# Altium PCB UKU205.PcbDoc (part 2 of 3)
Units mm, origin at the board's own origin, x right, y up, seen from the top; angles counter-clockwise.
Board outline 374.65 x 264.35 mm, 2 copper layers (Top Layer, Bottom Layer); 276 components, 443 nets, 1000 pads, 796 vias.
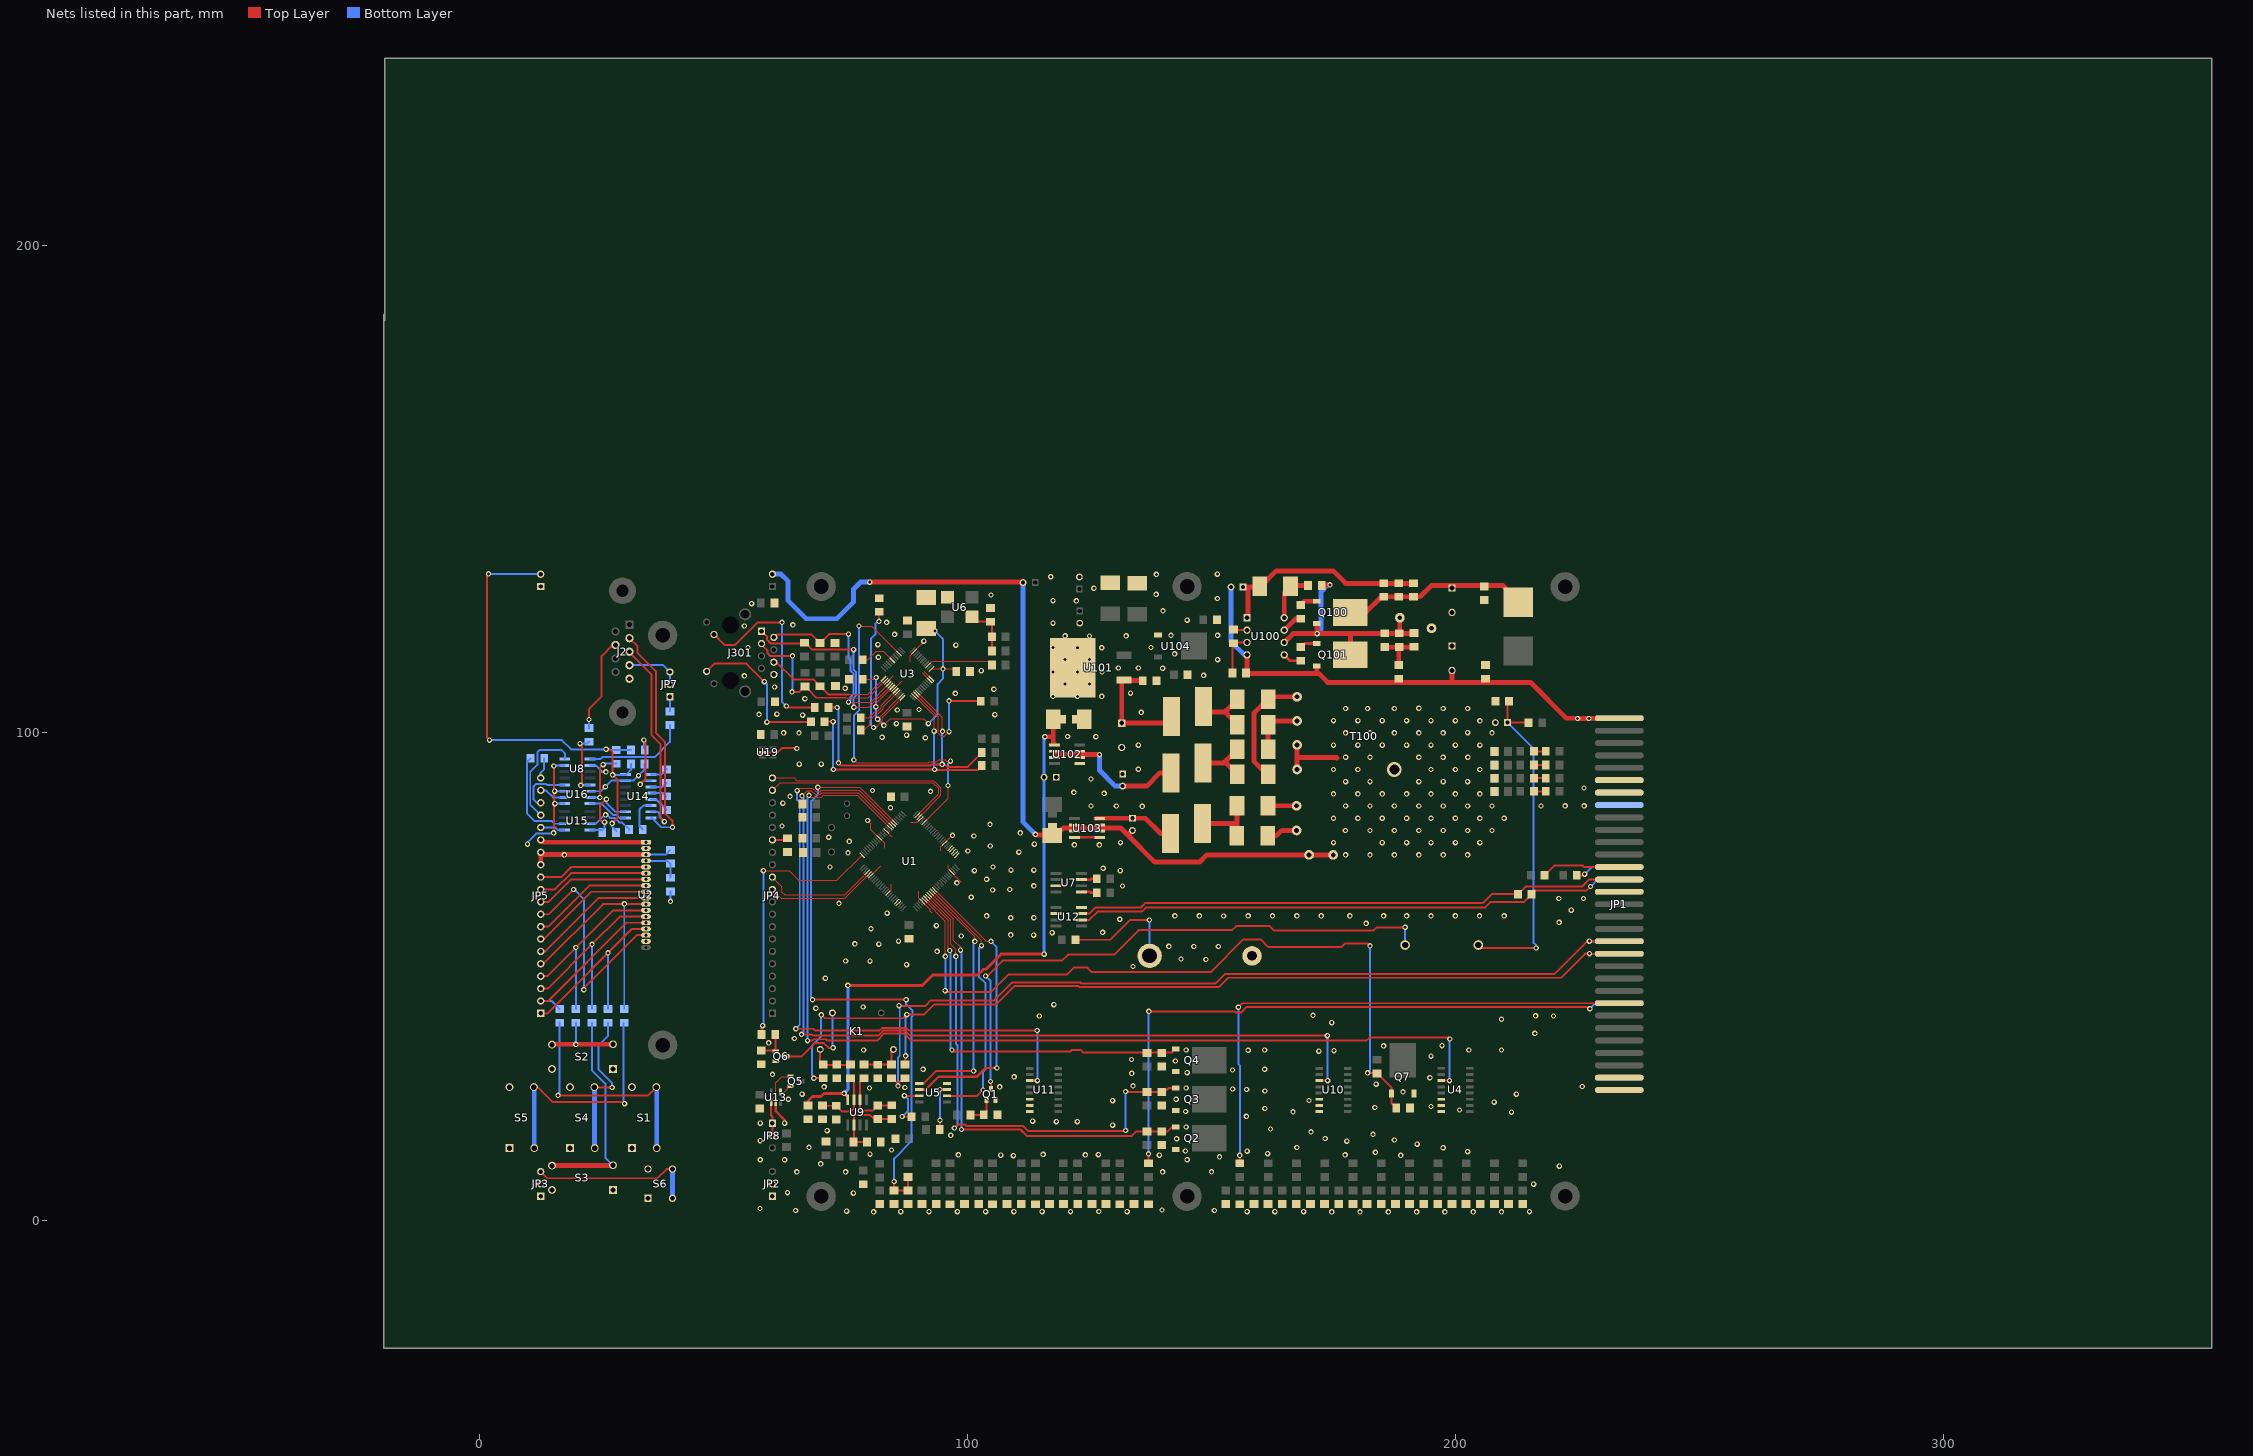
[diagram p2: the nets of this part, all layers, seen from the top]

## Via types
v1: diameter 1.1, hole 0.6, Top Layer to Bottom Layer, 795 vias
v2: diameter 3, hole 2, Top Layer to Bottom Layer, 1 vias

## Nets (pads, with @x,y where several pads share a name; then routed paths per layer and width w, separated by ;. In a path a pad name is that pad's centre, name@x,y a point inside that pad or via, vN(x,y) a via of type N, cw(c..) or ccw(c..) an arc to the next point about the centre after c; other vN are vias at no path point) (continued)
+IAKB: JP1.39 JP1.40 R62.1 R63.2 | length 201.7
  Top Layer w0.4: v1@68.8,29.25 68.838,29.212 R63.2@70.393,29.212 ; v1(70,42.2) 70.7,41.5 86.8,41.5 v1(87.55,42.25) 91.05,42.25 93.15,44.35 105.85,44.35 109.65,48.15 122.7,48.15 122.95,47.9 151.5,47.9 153.4,49.8 221.65,49.8 226.6,54.75 v1(227.5,54.75) 227.525,54.725 JP1.39@233.589,54.725 ; R62.1@87.15,32 87.178,32.028 87.3,32.15 v1@87.3,33.55
  Bottom Layer w0.4: v1@68.8,29.25 68.1,29.95 68.1,35.9 70,37.8 v1(70,42.2) ; v1@87.3,33.55 87.3,42 v1(87.55,42.25) ; v1(227.5,54.75) 227.525,54.725 JP1.40@233.589,54.725
  other v1: 68.5,29.2 87.3,33.8
+UOUT: 
-5V: C13.1 C16.2 C57.2 C105.2 U9.4 U102.1 | length 127.3
  Top Layer w0.6: C16.2@67.298,23.595 67.298,24.548 68.2,25.45 69.9,25.45 70.55,26.1 v1(74.7,26.1) 75.442,25.358 U9.4@75.442,24.811 ; v1(75.45,48.25) 90.75,48.25 92.85,50.35 102.05,50.35 103.25,51.55 103.8,51.55 106.9,54.65 v1(115.7,54.65)
  Top Layer w1: v1(115.85,99.2) 117.561,99.2 ; C105.2@117.561,102.794 117.561,97.939 U102.1@117.7,97.8
  Bottom Layer w0.6: v1(74.7,26.1) 75.45,26.85 v1(75.45,48.25) ; v1(115.7,54.65) 115.7,99.05 v1(115.85,99.2)
-5V_IZ: 
-5VIZ: C14.1 C59.2 C107.2 C108.2 JP6.2 T100.8 T100.9 U103.2 U103.3 U103.6 U103.7 | length 181.6
  Top Layer w1: v1(79.95,130.9) 111.35,130.9 C59.2@111.4,130.85 ; v1(113.9,79.2) 114.05,79.05 C108.2@117.4,79.05 ; C108.2@117.2,79.1 118.25,79.1 119.65,80.5 131.4,80.5 132.835,79.065 ; C107.2@133.792,79.989 132.868,79.065 132.835,79.065 ; T100.8@174.95,75 169.95,75 149.05,75 147.55,73.5 138.4,73.5 132.835,79.065
  Bottom Layer w1: JP6.2@60,132.54 61.76,132.54 63.2,131.1 63.2,127.1 66.9,123.4 73.2,123.4 76.65,126.85 76.65,129.5 78.05,130.9 v1(79.95,130.9) ; C59.2@111.4,130.85 111.4,81.7 v1(113.9,79.2)
-48V: C100.2 C106.2 C114.2 C117.2 JP1.1 JP1.2 Q101.3 R109.2 U100.4 | length 114.3
  Top Layer w1: C114.2@157.2,112.2 171.95,112.2 173.8,110.35 215.4,110.35 222.75,103 JP1.1@233.589,103 ; U100.4@157.284,115.983 157.284,112.266 157.325,112.225 157.35,112.2 C114.2@157.35,112.25 ; Q101.3@171.569,113.715 171.569,112.381 171.6,112.35 ; C106.2@199.293,112.801 199.293,110.443 199.3,110.435 199.3,110.4 ; v1(225.05,102.95) v1(227.35,102.95)
  Bottom Layer w1: C100.2@153.95,129.9 153.989,129.861 153.989,118.711 156.717,115.983 U100.4@157.284,115.983 ; v1(225.05,102.95) 225.1,103 JP1.2@233.589,103
-IAKB: JP1.37 JP1.38 R61.2 R62.2 | length 179.6
  Top Layer w0.4: R61.2@84.393,29.212 84.588,29.212 v1@85.75,28.05 ; v1@85.719,28.081 86.938,29.3 R62.2@87.2,29.3 ; v1(85.95,44.1) 86,44.05 91.4,44.05 92.5,45.15 105.5,45.15 109.2,48.85 123.05,48.85 123.25,48.65 150.85,48.65 152.8,50.6 220.35,50.6 227.05,57.3 v1(227.45,57.3) 227.5,57.25 JP1.37@233.6,57.25
  Bottom Layer w0.4: v1@85.75,28.05 85.75,33.45 86.1,33.8 86.1,43.95 v1(85.95,44.1) ; v1(227.45,57.3) 227.475,57.275 JP1.38@233.589,57.275
  other v1: 85.75,27.65
-UOUT: 
CANH: JP1.27 R129.2 U12.7 | length 113.1
  Top Layer w0.4: U12.7@123.339,62.932 124.932,62.932 126.25,64.25 135.55,64.25 136.4,65.1 205.6,65.1 207.45,66.95 R129.2@212.7,66.95 ; R129.2@212.812,66.907 214.406,68.5 225.95,68.5 227.4,69.95 JP1.27@233.589,69.95
CANL: JP1.28 R129.1 U12.6 | length 113.7
  Top Layer w0.4: U12.6@123.339,61.662 124.962,61.662 126.65,63.35 135.75,63.35 136.65,64.25 206.1,64.25 207.15,65.3 214.006,65.3 216.356,67.65 226.85,67.65 v1(227.7,68.5)
  Bottom Layer w0.4: v1(227.7,68.5) 229.15,69.95 JP1.28@233.589,69.95
DB4: 
GND: BT1.2 C1.2 C2.2 C3.2 C4.2 C5.2 C6.2 C7.2 C8.2 C9.2 C10.2 C11.1 C12.2 C13.2 C15.1 C16.1 C17.1 C18.2 C19.2 C20.2 C21.1 C22.1 C23.2 C24.1 C25.1 C31.1 C33.1 C34.2 C35.2 C36.1 C37.1 C38.1 C39.1 C40.1 C41.1 C42.2 C43.2 C44.2 C45.2 C46.2 C47.2 C48.2 C49.2 C50.2 C51.2 C52.2 C53.2 C54.2 C55.2 C56.2 C57.1 C58.2 C101.2 C102.2 C104.1 C105.1 C109.1 C110.2 C301.1 C302.1 C303.1 C304.1 D1.1 D3.1 D4.1 D5.1 D7.1 D8.1 J301.8 JP1.11 JP1.12 JP1.13 JP1.14 JP1.59 JP1.60 JP1.61 JP1.62 JP2.1 JP2.2 Q1.2 Q2.3 Q3.3 Q4.3 Q6.2 Q7.3 R10.2 R12.2 R13.2 R14.2 R15.2 R16.2 R23.1 R24.1 R26.1 R27.1 R28.1 R29.1 R36.1 R49.1 R57.1 R58.1 R60.1 R74.2 R75.2 R76.2 R77.2 R78.2 R111.1 R112.1 R113.1 R114.1 R117.1 R118.1 R122.2 R126.2 R127.2 R128.2 T100.4 T100.5 U1.11 U1.15 U1.31 U1.41 U1.55 U1.72 U1.83 U1.97 U3.15 U3.19 U3.35 U3.36 U3.47 U4.6 U4.7 U4.8 U5.4 U6.2 U7.3 U10.6 U10.7 U10.8 U11.6 U11.7 U11.8 U12.2 U12.8 U13.2 U19.2 U101.4 U102.5 U104.1 | length 69.9
  Top Layer w0.25: v1(79.5,82.05) 80.2,81.35 80.2,80.186 83,77.386 83,76.3 ; U1.31@80.145,70.695 82.15,72.7 82.2,72.7 ; U1.11@83.327,79.887 84.5,78.714 84.5,78.7 ; U3.15@83.498,110.397 84.801,111.7 ; U1.41@83.681,67.159 84.4,67.878 84.4,69 ; U3.19@84.912,108.983 86.629,110.7 ; 88.25,114.6 88.25,115.856 v1@91.05,118.656 ; 88.4,81.65 89.686,81.65 U1.97@90.398,82.362 ; 90,67.5 90,66.143 92.35,63.793 92.35,63.404 92.642,63.112 ; 90.7,112.3 90.7,112.281 U3.35@92.23,110.75 ; 91.038,112.65 U3.36@92.584,111.104 ; 94.55,75.8 94.55,76.614 96.9,78.964 v1(96.9,79) ; 96,72.95 96,72.164 98.65,69.514 98.65,69.5
  Top Layer w0.4: U19.2@57.934,95.992 61.101,95.992 62.009,96.9 64.9,96.9 v1(65,96.8)
  Top Layer w0.5: U13.2@60.7,24.225 60.7,22.45 62.5,20.65 v1(62.5,20)
  Top Layer w1: T100.4@167.55,92.5 T100.5@167.55,97.55 ; 167.55,94.95 175.599,94.95 175.699,94.85
  other v1: 80.75,1.8 174.65,1.8 180.45,1.8 186.25,1.8 192.05,1.8 197.85,1.8 203.65,1.8 209.45,1.8 86.3,1.85 92.1,1.85 97.9,1.85 103.7,1.85 109.5,1.85 115.3,1.85 121.1,1.85 132.7,1.85 157.299,1.85 162.999,1.85 168.899,1.85 215.199,1.85 126.9,1.9 75.2,1.95 64.75,2.1 150.6,2.1 139.85,2.2 57.45,2.5 76.6,5.65 63.1,5.75 216.05,7.5 65,10 75,10 140,10 150,10 221.3,11.2 69.9,11.65 57.5,12.5 62.5,12.5 145,12.5 151.65,13.1 109.4,13.35 188.799,13.4 106.8,13.45 139.3,13.45 98.1,13.5 124.15,13.5 177.399,13.5 126.8,13.55 115.5,13.6 80,13.65 161.499,13.75 183.6,14 202.499,14.15 157.299,14.25 144.65,14.3 84.4,14.5 197.499,14.95 167.499,15 67.5,15.05 192.15,15.7 177.75,16.3 57.5,16.4 187.499,16.55 142.85,16.8 173.299,16.85 96.55,17.5 183.1,17.7 170.399,18.2 71.2,18.45 162.1,18.8 144.8,19.2 129.75,19.6 57.5,20 118.2,20.3 122.5,20.3 113.35,20.4 157.15,21.4 211.499,22.25 166.7,22.3 144.7,22.4 200.85,22.7 160.95,23 183.499,23.2 195,23.4 207.95,24.3 129.75,24.6 169.999,24.65 63.25,24.9 142.75,24.9 66.1,25.95 212.499,25.95 189.25,26.4 160.95,26.6 157.199,26.9 154.35,27 79.9,27.2 144.8,27.2 87.15,27.3 70.6,27.45 106.6,27.45 226,27.5 133.9,27.65 183.75,28 194.75,29.3 109.55,29.5 60,30 133.65,30.2 145,30.35 154.3,30.9 90.9,31.05 160.899,31.05 142.6,32.75 133.6,33.05 194.999,33.75 171.999,34.75 175.099,34.85 157.499,34.95 78.7,35 144.8,35 160.9,35 202.75,35 209.45,35 185.299,35.85 197.25,35.9 59.25,36.45 64.5,37.35 216.3,38.4 174.65,40.6 209.45,41.3 114.7,41.95 220.099,41.95 216.45,42 170.8,42.1 68.9,43.55 78.6,43.8 117.7,44.3 70.85,49.7 133.9,52.1 87.5,52.5 80,53.2 75,53.25 148.85,53.55 143.75,53.65 93.75,55.2 146.4,56.2 151.4,56.2 141.25,56.25 81.8,56.7 76.9,56.75 85.85,57.3 98.7,58.35 113.55,58.55 108.85,58.6 117.35,59.05 127.7,59.1 80.2,59.85 93.6,60.5 181.7,60.95 221.25,61.15 131.2,61.8 108.85,62.1 113.6,62.1 152.5,62.45 103.9,62.5 142.5,62.5 147.5,62.5 157.5,62.5 162.5,62.5 167.5,62.5 172.5,62.5 178.35,62.5 185.3,62.5 190,62.5 195,62.5 200,62.5 204.95,62.5 210,62.5 83.5,63.05 223.75,63.65 73.65,65.05 221.2,66.05 226.25,66.05 100.75,66.3 105.15,67.8 108.65,67.9 131.75,68.6 113.6,68.65 97.8,69.25 103.9,70 101.4,71.75 131.3,71.75 108.9,71.85 113.6,71.85 127.8,72.25 71.8,72.5 105.2,72.5 177.499,75 182.499,75 187.499,75 192.499,75 197.5,75 202.499,75 75.5,75.4 110.5,75.55 100.05,75.8 104.65,76.8 121.9,77.05 127,77.05 113.7,77.2 131.35,77.5 174.999,77.5 185,77.5 189.999,77.5 195,77.5 199.999,77.5 204.999,77.5 75.75,77.75 71.55,78.6 101.3,78.85 110.8,79.5 177.45,80 182.5,80 187.5,80 192.5,80 197.5,80 202.5,80 207.499,80 61.95,80.9 104.6,81.25 175,82.5 179.999,82.5 184.999,82.5 190,82.5 195,82.5 199.999,82.5 205,82.5 209.999,82.5 84.2,84.65 135.8,84.95 125.3,85 130.5,85 177.499,85 182.499,85 187.5,85 192.499,85 197.5,85 202.499,85 207.5,85 217.55,85 222.499,85.05 226.399,85.05 62.15,85.6 63.6,87 174.999,87.5 180,87.5 185,87.5 189.999,87.5 194.999,87.5 199.999,87.5 204.999,87.5 128,87.6 121.8,87.8 92.4,88 80.5,88.2 226.35,88.7 177.499,90 182.499,90 192.5,90 197.5,90 202.5,90 125.3,90.55 174.999,92.5 180,92.5 194.999,92.5 200,92.5 204.999,92.5 135,92.55 65.5,93.6 70,93.6 177.5,95 182.499,95 192.499,95 197.499,95 202.55,95 135,97.5 174.999,97.5 180,97.5 184.999,97.5 189.999,97.5 195,97.5 199.999,97.5 205,97.5 91.35,99 82.5,99.1 126.3,99.2 120.5,99.25 87.5,99.55 62.3,100 65.45,100 177.499,100 182.5,100 187.5,100 192.499,100 197.499,100 207.5,100 202.499,100.05 85.4,101.9 204.999,102.45 174.999,102.5 179.999,102.5 185,102.5 190,102.5 194.999,102.5 199.999,102.5 66.2,103.65 105.6,103.75 57.25,103.8 60.9,103.85 135.6,104.2 85.6,104.7 90.05,104.8 187.5,105 202.5,105 177.499,105 181.999,105 197.499,105 192.499,105.05 66.65,107 117.5,107.5 122.5,107.5 127.5,107.5 97.5,108.1 133.4,108.15 105.4,108.95 74.9,109.15 60.45,109.4 120,110 125,110 54.25,111.7 148.4,111.8 122.5,112.45 117.55,112.5 127.55,112.5 102.8,112.75 140,113.25 130.9,113.3 135,113.3 120,115 125,115 151.25,115 81.7,115.5 142.45,116.2 122.5,117.45 127.5,117.45 55,117.5 117.5,117.5 137.6,117.5 97.6,118 81.6,118.1 91.05,118.8 125,119.85 120,119.9 132.5,119.9 141.7,120 151.25,120 85.05,120.2 54.25,121.9 64.2,122.15 117.5,122.5 83.4,122.65 145,123.1 140.05,125 55.75,126.5 122.3,127.05 117.5,127.1 151.2,127.55 104.8,128.25 138.65,128.4 125.9,129.65 117.05,132 138.7,132.5 151.2,132.55
  other v2: 187.5,92.5
I1: JP1.47 R6.2 | length 110.5
  Top Layer w0.4: v1(155.5,43.75) 156.325,44.575 JP1.47@233.575,44.575 ; v1(155.8,13.4) 155.807,13.393 R6.2@155.807,11.788
  Bottom Layer w0.4: v1(155.5,43.75) 155.5,32.15 155.807,31.843 v1@155.807,13.393
I2: JP1.48 R7.2 | length 128.7
  Top Layer w0.4: v1@137.1,13.2 137.107,13.193 R7.2@137.107,11.788 ; v1(137.15,42.9) 154.7,42.9 154.95,42.65 156.05,42.65 157.25,43.85 227.15,43.85 v1(227.55,43.45)
  Bottom Layer w0.4: v1@137.1,13.2 v1@137.1,42.85 ; v1(227.55,43.45) 228.675,44.575 JP1.48@233.589,44.575
  other v1: 137.1,13.7
NetA1_1: A1.1 Q1.3 | length 118.2
  Top Layer w0.4: v1(103.7,50.15) 104.05,50.15 107.2,53.3 119.35,53.3 120.6,54.55 130.05,54.55 135.05,59.55 154.2,59.55 155.05,60.4 161.9,60.4 162.85,59.45 183.15,59.45 183.85,60.15 v1(189.7,60.15) ; v1(104.7,28.55) 104.8,28.55 104.802,28.548 Q1.3@104.802,26.998
  Bottom Layer w0.4: v1(103.7,50.15) 104.7,49.15 v1(104.7,28.55) ; A1.1@189.697,56.512 189.697,60.147 v1(189.7,60.15)
NetA1_2: A1.2 C19.1 R56.1 R57.2 | length 69.5
  Top Layer w0.4: A1.2@204.7,56.45 205.25,55.9 v1(216.55,55.9) ; R57.2@211,106.45 210.657,106.107 210.657,102.093 R56.1@214.988,102.093
  Bottom Layer w0.4: C19.1@210.689,102.108 216.05,96.747 216.05,56.95 216.55,56.45 v1(216.55,55.9)
NetBT1_1: BT1.1 D6.1 | length 24.2
  Top Layer w0.4: D6.1@122.095,57.591 129.241,57.591 133.3,61.65 v1(137.25,61.65)
  Bottom Layer w0.4: v1(137.25,61.65) 137.305,61.595 BT1.1@137.305,54.291
NetC9_1: C9.1 C10.1 C20.1 U3.18 U3.23 U3.37 | length 63.9
  Top Layer w0.25: C10.1@78.505,110.998 80.798,110.998 v1@81.15,111.35 ; v1(81.2,105.35) 81.2,105.978 U3.18@84.558,109.336 ; v1(81.55,102.8) 81.558,102.8 U3.23@86.326,107.568 ; v1(82.85,101.55) 84.15,102.85 91,102.85 v1(91.95,101.9) ; U3.37@92.584,113.119 97.178,113.119 C9.1@97.695,112.602
  Top Layer w0.4: C20.1@91.3,121.35 92.811,121.389 v1(93.3,120.9)
  Bottom Layer w0.4: v1@81.15,111.35 81.2,111.3 81.2,103.2 81.575,102.825 v1(82.85,101.55) ; v1(91.95,101.9) 92,101.95 92,102 93.85,103.85 93.85,110 94.95,111.1 94.95,119.25 v1(93.3,120.9)
  other v1: 81.25,111.35 94.95,113.119
NetC18_1: C18.1 R50.1 R51.1 U6.4 | length 10.3
  Top Layer w0.4: U6.4@100.9,123.8 101.912,122.788 C18.1@104.707,122.788 104.988,122.507 R50.1@104.988,119.693 R51.1@104.988,116.793
NetC22_2: C22.2 K1.3 R61.1 R64.1 | length 8.9
  Top Layer w0.4: R64.1@78.75,31.9 78.862,32.012 R61.1@84.393,32.012 84.393,34.643 K1.3@84.8,35.05
NetC23_1: C23.1 K1.1 R63.1 R65.1 | length 9
  Top Layer w0.4: K1.1@69.794,35.11 69.794,32.506 70.4,31.9 R65.1@75.95,31.9
NetC24_2: C24.2 C32.2 R59.1 R66.1 U9.6 | length 16.2
  Top Layer w0.4: U9.6@76.712,19.611 76.712,21.212 77.15,21.65 80.05,21.65 80.85,20.85 84.431,20.85 C32.2@84.443,20.862 ; U9.6@76.75,19.7 76.75,16.25 76.65,16.15 76.7,16.1 C24.2@79.35,16.1
NetC26_1: C26.1 U14.3 | length 3.5
  Bottom Layer w0.4: U14.3@35.089,88.913 37.463,88.913 C26.1@38.25,89.7
NetC26_2: C26.2 U14.1 | length 3.7
  Bottom Layer w0.4: U14.1@35.089,91.453 37.203,91.453 C26.2@38.3,92.55
NetC27_1: C27.1 U14.2 | length 14.2
  Top Layer w0.4: v1(32.9,89.45) 33.95,90.5 33.95,98.25 v1(33.65,98.55)
  Bottom Layer w0.4: v1(32.9,89.45) 33.633,90.183 U14.2@35.089,90.183 ; v1(33.65,98.55) 33.65,96.85 C27.1@33.9,96.6
NetC27_2: C27.2 C28.1 JP9.2 R47.1 R48.2 U14.16 | length 99.5
  Top Layer w0.4: v1@1.5,132.6 1.5,99 v1(2,98.5) ; v1(25.9,96.65) 26.6,96.65 27.25,96 v1(27.25,91.4) 28.25,90.4 28.25,82.55 v1(27.15,81.45)
  Bottom Layer w0.4: v1@1.5,132.6 12.423,132.6 JP9.2@12.488,132.535 ; v1(2,98.5) 16.85,98.5 18.75,96.6 26.65,96.6 ; 26.669,96.581 26.757,96.493 C27.2@31.012,96.493 ; v1(27.15,81.45) 27.15,80.756 R47.1@28.012,79.893 ; v1(27.25,91.4) 30,91.4 30.995,92.395 C28.1@30.995,93.598
  other v1: 1.8,132.6
NetC28_2: C28.2 C30.2 J2.5 JP9.1 U8.2 U14.15 U15.7 U16.2 | length 28
  Bottom Layer w0.4: U15.7@22.589,81.368 23.768,81.368 25.5,83.1 26.25,83.1 26.8,82.55 27.65,82.55 27.769,82.431 ; U16.2@22.611,88.032 24.832,88.032 v1(25.761,88.961) 27,90.2 31.5,90.2 33.8,92.5 C28.2@33.8,93.598 ; U8.2@22.611,93.332 23.768,93.332 25.1,92 v1(25.85,92) ; 27.7,82.5 27.769,82.431 ; C30.2@30.605,80.202 29.157,81.65 28.55,81.65 27.769,82.431
  other v1: 25.8,83.2 32.535,91.235
NetC29_1: C29.1 U14.4 | length 3.4
  Bottom Layer w0.4: U14.4@35.089,87.643 37.507,87.643 C29.1@38.2,86.95
NetC29_2: C29.2 U14.5 | length 4.1
  Bottom Layer w0.4: U14.5@35.089,86.373 36.129,86.373 C29.2@38.298,84.205
NetC30_1: C30.1 U14.6 | length 7
  Bottom Layer w0.4: C30.1@33.405,80.202 32.75,80.857 32.75,84.3 33.553,85.103 U14.6@35.089,85.103
NetC32_1: C32.1 R59.2 R64.2 U9.2 | length 13.7
  Top Layer w0.4: R64.2@78.793,29.212 77.982,28.401 U9.2@77.982,24.811 77.982,22.918 78.35,22.55 80.519,22.55 81.631,23.662 C32.1@84.443,23.662
NetC35_1: C35.1 R60.2 R65.2 U9.3 | length 13.7
  Top Layer w0.4: R60.2@70.257,23.588 70.282,23.562 C35.1@73.093,23.562 74.256,22.4 76.15,22.4 76.712,22.962 U9.3@76.712,24.811 76.712,28.493 R65.2@75.993,29.212
NetC100_1: C100.1 D100.1 R100.2 R101.2 R102.2 U100.1 | length 43.9
  Top Layer w1: C100.1@156.489,129.908 160.008,129.908 163.3,133.2 174.95,133.2 177.5,130.65 185.45,130.65 R102.2@191.5,130.65 ; U100.1@157.3,123.55 157.5,123.75 157.5,129.9
NetC101_1: C101.1 C109.2 L100.2 U101.1 | length 23.6
  Top Layer w0.7: L100.2@141.768,103.393 L100.2@141.793,103.393
  Top Layer w1: C109.2@135.905,110.698 135.852,110.75 132,110.75 131.593,110.343 C101.1@131.593,102.001 140.401,102.001 141.78,103.38 L100.2@141.793,103.393
NetC103_1: C103.1 FU100.2 Q100.4 R100.1 R101.1 R102.1 R103.1 | length 38.2
  Top Layer w1: Q100.4@178.419,124.7 181.65,124.7 184.85,127.9 191.65,127.9 192.749,127.9 195.049,130.2 199.9,130.2 209.75,130.2 212.7,127.25 FU100.2@212.7,126.85
NetC103_2: C103.2 C106.1 R103.2 R109.1 T100.1
NetC104_2: C104.2 L101.2 U102.2 U102.3 U102.6 U102.7 | length 29.6
  Top Layer w1: 117.8,95.6 127,95.6 v1(127.05,95.55) ; C104.2@131.75,89.1 136.689,89.089 139.393,91.793 L101.2@141.668,91.793
  Bottom Layer w1: v1(127.05,95.55) 127.05,92.3 130.25,89.1 C104.2@131.75,89.1
NetC107_1: C107.1 L102.2 U103.8 | length 16.5
  Top Layer w1: U103.8@126.35,82.45 126.389,82.489 136.461,82.489 139.557,79.393 L102.2@141.568,79.393
NetC111_1: C111.1 D100.2 U100.8 | length 10.6
  Top Layer w1: U100.8@164.903,123.603 U100.8@164.904,123.603 164.904,128.704 166.402,130.202 C111.1@169.795,130.202
NetC111_2: C111.2 Q100.3 Q101.4 R106.1 R107.1 R108.1 T100.2 U100.6 | length 49.1
  Top Layer w1: U100.6@164.904,118.523 166.731,120.35 191.381,120.35 R106.1@191.494,120.463 ; v1@171.65,120.45 Q100.3@171.65,122.35 ; C111.2@172.55,130.3 173.8,130.3 v1@173.85,130.35 ; Q101.4@178.4,116.05 178.5,116.15 178.5,120.35 ; R107.1@188.6,120.35 T100.2@188.6,123.6
  Bottom Layer w1: v1(171.65,120.35) 172.45,121.15 172.45,128.95 v1@173.85,130.35
  other v1: 174.3,130.35
NetC114_1: C114.1 R105.1 U100.3 | length 9
  Top Layer w0.4: C114.1@154.288,112.293 154.288,118.169 R105.1@154.507,118.388 154.642,118.523 U100.3@157.284,118.523
NetC117_1: C117.1 R106.2 R107.2 R108.2 | length 10
  Top Layer w1: R108.2@185.3,117.55 191.6,117.55 R106.2@191.65,117.5 ; C117.1@188.393,113.912 188.393,117.493 R107.2@188.45,117.55
NetD101_1: D101.1 D102.2 T100.3 | length 24
  Top Layer w1: D102.2@161.45,91.4 158.7,94.15 158.7,104.05 162.05,107.4 T100.3@167.55,107.4
NetD101_2: D101.2 D103.2 L100.1 | length 12.3
  Top Layer w1: L100.1@148.372,105.425 149.497,104.3 153.05,104.3 ; D103.2@155.309,101.706 155.344,101.706 153,104.05 153,104.559 D101.2@155.309,106.869
NetD102_1: D102.1 D104.1 L101.1 | length 11.9
  Top Layer w1: L101.1@148.272,93.825 152.965,93.825 ; D102.1@155.309,91.481 152.9,93.891 152.9,94.235 D104.1@155.309,96.644
NetD103_1: D103.1 D104.2 T100.6 | length 11.4
  Top Layer w1: D104.2@161.65,96.55 161.607,96.593 161.6,96.6 161.6,101.7 162.35,102.45 T100.6@167.55,102.45
NetD105_1: D105.1 T100.7 | length 5.9
  Top Layer w1: D105.1@161.6,85.05 T100.7@167.45,85.05
NetD105_2: D105.2 D106.2 L102.1 | length 13.2
  Top Layer w1: L102.1@148.172,81.425 155.125,81.425 155.191,81.359 ; D106.2@155.191,78.906 155.191,85.041 D105.2@155.2,85.05
NetD106_1: D106.1 T100.10 | length 6.4
  Top Layer w1: D106.1@161.55,78.915 D106.1@161.541,78.906 163.306,78.906 164.4,80 T100.10@167.45,80
NetJ2_2: J2.2 U14.8 | length 47.6
  Top Layer w0.4: J2.2@30.684,119.411 32.35,117.745 32.35,116.35 36.1,112.6 36.1,100 37.95,98.15 37.95,83.55 39.5,82 v1(39.5,80.65)
  Bottom Layer w0.4: U14.8@35.089,82.563 35.287,82.563 37.2,80.65 v1(39.5,80.65)
NetJ2_3: J2.3 U14.7 | length 41.8
  Top Layer w0.4: J2.3@30.684,116.641 30.684,116.516 35.2,112 35.2,99.6 37.05,97.75 37.05,82.6 v1(37.85,81.8)
  Bottom Layer w0.4: U14.7@35.089,83.833 36.467,83.833 36.85,83.45 36.85,82.8 v1(37.85,81.8)
NetJ2_4: J2.4 JP7.2 JP7.3 | length 11.4
  Bottom Layer w0.4: J2.4@30.684,113.871 37.589,113.871 39,112.46 JP7.2@39,110
NetJ2_7: J2.7 R52.2 | length 19.8
  Top Layer w0.4: v1@22.4,102.35 22.4,104.9 25,107.5 25,115.75 27.276,118.026 J2.7@27.844,118.026
  Bottom Layer w0.4: v1@22.4,102.35 22.4,100.9 R52.2@22.45,100.85
  other v1: 22.4,102.75
NetJ301_1: J301.1 R301.1 U3.17 | length 42.4
  Top Layer w0.25: v1(76.7,105.25) 79.765,105.25 U3.17@84.205,109.69
  Top Layer w0.4: J301.1@57.75,120.845 58.9,119.695 58.9,119.05 59.6,118.35 66.5,118.35 66.9,118.35 68.2,117.05 v1(76.65,117.05)
  Bottom Layer w0.4: v1(76.65,117.05) 76.65,112.905 77.15,112.405 77.15,107.694 76.65,107.194 76.65,105.3 v1(76.7,105.25)
NetJ301_2: J301.2 R302.2 U3.16 | length 41.7
  Top Layer w0.25: v1(75.6,106.3) 80.108,106.3 U3.16@83.851,110.043
  Top Layer w0.4: J301.2@60.3,119.575 60.925,120.2 67.95,120.2 69.75,118.4 71.6,120.25 v1(75.6,120.25)
  Bottom Layer w0.4: v1(75.6,106.3) 76,106.7 76,107.322 76.6,107.922 76.6,112.178 76,112.778 76,114.85 75.6,115.25 v1(75.6,120.25)
NetJ301_3: J301.3 R303.1 U3.14 | length 37.3
  Top Layer w0.25: 74.95,107.2 79.594,107.2 U3.14@83.144,110.75
  Top Layer w0.4: J301.3@57.75,118.305 57.75,118.1 59,116.85 59,116.3 59.5,115.8 v1(64.1,115.8) ; v1(64,108.4) 65.519,108.4 R303.1@66.657,109.538 R303.1@67.397,108.797 ; R303.1@67.4,108.8 69,107.2 74.95,107.2
  Bottom Layer w0.4: v1(64,108.4) 64.1,108.5 v1(64.1,115.8)
NetJ301_6: J301.6 R304.2 U3.13 | length 26.5
  Top Layer w0.25: 75.6,107.9 79.587,107.9 U3.13@82.79,111.104
  Top Layer w0.4: J301.6@60.3,114.495 60.805,114.495 64.35,110.95 68.356,110.95 71.406,107.9 75.6,107.9
NetJ301_10: J301.10 R305.1 | length 40.2
  Top Layer w0.4: J301.10@48.02,120.17 50.14,118.05 52.35,118.05 56.95,122.65 v1(61.95,122.65) ; v1(62.85,105.5) 63.157,105.193 R305.1@68.688,105.193
  Bottom Layer w0.4: v1(61.95,122.65) 61.95,106.4 v1(62.85,105.5)
NetJ301_11: J301.11 R306.1 | length 31.8
  Top Layer w0.4: J301.11@46.5,112.6 48.1,114.2 54.65,114.2 v1(58.35,110.5) ; v1(58.85,102.2) R306.1@68.1,102.2
  Bottom Layer w0.4: v1(58.35,110.5) 58.85,110 v1(58.85,102.2)
NetJP1_16: JP1.16
NetJP1_29: JP1.29
NetJP3_1: JP3.1 JP3.2 R90.2 S1.1 S2.1 S3.1 S4.1 S5.1 S6.1 U2.2 U8.7 U16.5 U16.7 | length 28.3
  Top Layer w0.4: v1(15.15,79.5) 15.2,79.55 v1(15.2,93.2)
  Bottom Layer w0.4: v1(9.8,77.2) 9.8,77.6 11.55,79.35 15,79.35 v1(15.15,79.5) ; v1(15.2,93.2) 15.332,93.332 U8.7@17.411,93.332 ; v1(15.35,88.05) 15.368,88.032 U16.7@17.411,88.032 ; v1(15.408,85.492) U16.5@17.411,85.492 ; v1@39.1,65.85 39.107,65.857 R90.2@39.107,67.512
  other v1: 39.1,65.45
NetJP3_3: JP3.3 S6.2 | length 34.4
  Top Layer w0.4: JP3.3@12.489,10.071 13.86,8.7 36.4,8.7 38.291,10.591 S6.2@39.501,10.591
  Bottom Layer w1: S6.2@39.5,4.55 39.501,4.551 S6.2@39.501,10.591
NetJP4_15: JP4.15 R29.2 | length 3.3
  Top Layer w0.4: JP4.15@60,78.06 62.783,78.06 R29.2@63.114,78.391
NetJP5_1: JP5.1 R4.2 U2.15 | length 40.3
  Top Layer w0.4: JP5.1@12.5,42.5 13.9,42.5 31.21,59.81 U2.15@34.075,59.81
  Bottom Layer w0.4: v1(26.3,54.9) 26.317,54.883 R4.2@26.317,43.388
NetJP5_2: JP5.2 R1.2 U2.14 | length 32.8
  Top Layer w0.4: JP5.2@12.5,45.04 14.04,45.04 30.08,61.08 U2.14@34.075,61.08
  Bottom Layer w0.4: JP5.2@12.5,45.04 14.741,45.04 R1.2@16.393,43.388
NetJP5_3: JP5.3 R3.2 U2.13 | length 41
  Top Layer w0.4: JP5.3@12.5,47.58 13.93,47.58 v1(23,56.65) 28.7,62.35 U2.13@34.075,62.35
  Bottom Layer w0.4: v1(23,56.65) 23.009,56.641 R3.2@23.009,43.388
NetJP5_4: JP5.4 R2.2 U2.12 | length 39.8
  Top Layer w0.4: JP5.4@12.5,50.12 13.82,50.12 27.32,63.62 U2.12@34.075,63.62
  Bottom Layer w0.4: v1(19.7,56) 19.701,55.999 R2.2@19.701,43.388
NetJP5_5: JP5.5 R5.2 U2.11 | length 48.2
  Top Layer w0.4: JP5.5@12.5,52.66 13.06,52.66 25.29,64.89 U2.11@34.075,64.89
  Bottom Layer w0.4: R5.2@29.625,43.388 29.625,64.925 v1(29.65,64.95)
NetJP5_6: JP5.6 U2.10 | length 26.1
  Top Layer w0.4: JP5.6@12.5,55.2 13.45,55.2 24.41,66.16 U2.10@34.075,66.16
NetJP5_7: JP5.7 U2.9 | length 25.6
  Top Layer w0.4: JP5.7@12.5,57.74 13.14,57.74 22.83,67.43 U2.9@34.075,67.43
NetJP5_8: JP5.8 U2.8 | length 25.1
  Top Layer w0.4: JP5.8@12.5,60.28 14.03,60.28 22.45,68.7 U2.8@34.075,68.7
NetJP5_9: JP5.9 U2.16 | length 47.9
  Top Layer w0.4: JP5.9@12.5,62.82 14.17,62.82 v1(19.25,67.9) ; v1(21.35,47.35) 21.35,47.7 32.19,58.54 U2.16@34.075,58.54
  Bottom Layer w0.4: v1(19.25,67.9) 19.35,67.9 21.35,65.9 v1(21.35,47.35)
NetJP5_10: JP5.10 U2.7 | length 23.5
  Top Layer w0.4: JP5.10@12.5,65.36 14.11,65.36 18.72,69.97 U2.7@34.075,69.97
NetJP5_11: JP5.11 U2.6 | length 23
  Top Layer w0.4: JP5.11@12.5,67.9 15.4,67.9 18.74,71.24 U2.6@34.075,71.24
NetJP5_12: JP5.12 U2.5 | length 22.4
  Top Layer w0.4: JP5.12@12.5,70.44 16.74,70.44 18.81,72.51 U2.5@34.075,72.51
NetJP5_13: JP5.13 JP5.14 R89.1 U2.3 | length 29.9
  Top Layer w1: JP5.13@12.45,73 12.5,73.05 12.5,75.5 12.5,75.05 U2.3@34.075,75.05
  Bottom Layer w0.4: U2.3@34.075,75.05 38.1,75.05 R89.1@39.05,76
  other v1: 17.35,75
NetJP5_15: JP5.15 U2.1 | length 21.8
  Top Layer w1: JP5.15@12.5,78.15 13.06,77.59 U2.1@34.075,77.59
NetJP5_16: JP5.16 U15.1 | length 5.2
  Bottom Layer w0.4: JP5.16@12.55,80.65 JP5.16@12.5,80.6 15.5,80.6 16.002,80.098 U15.1@17.389,80.098
NetJP5_17: JP5.17 U8.8 | length 21.6
  Bottom Layer w0.4: JP5.17@12.5,83.14 10.35,85.29 10.35,92 11.8,93.45 11.8,96 12.25,96.45 16.8,96.45 17.45,95.8 17.45,94.7 U8.8@17.4,94.65
NetJP5_18: JP5.18 U16.8 | length 11.1
  Bottom Layer w0.4: JP5.18@12.5,85.7 JP5.18@12.5,85.68 11.67,85.68 11,86.35 11,89 11.5,89.5 13.6,89.5 13.798,89.302 U16.8@17.411,89.302
NetJP5_19: JP5.19 U16.6 | length 5.5
  Bottom Layer w0.4: JP5.19@12.5,88.22 13.58,88.22 15.038,86.762 U16.6@17.411,86.762
NetJP5_20: JP5.20 R43.1 | length 4.3
  Bottom Layer w0.4: JP5.20@12.5,90.76 12.5,91.8 13.212,92.512 R43.1@13.212,94.793
NetJP7_1: JP7.1 R53.2 | length 3
  Bottom Layer w0.4: JP7.1@38.989,107.391 38.989,104.461 R53.2@39.05,104.4
NetJP8_1: JP8.1 JP8.2 Q5.1 U13.1 | length 14.9
  Top Layer w0.25: U13.1@59.75,24.225 59.75,24.8 60.65,25.7 60.65,28.3 61.894,29.544 Q5.1@63.695,29.544
  Top Layer w0.4: U13.1@59.75,24.225 59.75,21.6 60,21.35 JP8.2@60,17.46
NetK1_5: K1.5 Q6.3 | length 18.3
  Top Layer w0.4: Q6.3@62.898,33.698 65.998,33.698 68.7,36.4 70.55,36.4 71.5,35.45 v1(72.45,35.45)
  Bottom Layer w0.4: K1.5@72.294,42.61 72.294,35.606 v1(72.45,35.45)
NetQ1_1: Q1.1 R34.2 R36.2 | length 6
  Top Layer w0.4: R34.2@100.588,21.693 103.299,21.693 R36.2@103.312,21.707 103.852,22.246 Q1.1@103.852,24.798
NetQ5_2: Q5.2 U13.4 | length 2.6
  Top Layer w0.25: U13.4@61.65,26.375 62.426,26.375 Q5.2@63.695,27.644
NetQ6_1: Q6.1 R35.2 R58.2 | length 6.7
  Top Layer w0.4: R58.2@57.707,34.888 60.459,34.888 Q6.1@60.698,34.648 60.588,34.759 R35.2@60.588,38.193
NetQ100_1: Q100.1 R104.2 | length 3.7
  Top Layer w1: R104.2@168.2,126.2 168.985,126.985 Q100.1@171.569,126.985
NetQ101_1: Q101.1 R110.2 | length 3.6
  Top Layer w0.6: R110.2@168.307,117.588 169.069,118.35 Q101.1@171.55,118.35
NetR1_1: R1.1 S1.2 | length 48.5
  Top Layer w0.4: v1(16.05,25.7) 34.512,25.7 S1.2@36.203,27.391
  Bottom Layer w0.4: v1(16.05,25.7) 16.35,26 16.35,40.544 R1.1@16.393,40.588
  Bottom Layer w1: S1.2@36.2,27.5 36.256,27.444 36.283,27.417 S1.2@36.283,14.891
NetR2_1: R2.1 S2.2 | length 16.9
  Top Layer w1: S2.2@14.889,36.183 S2.2@27.309,36.183
  Bottom Layer w0.4: v1(19.7,36.15) v1(19.7,36.15) R2.1@19.701,40.588
NetR3_1: R3.1 S3.2 | length 43.5
  Top Layer w1: S3.2@14.809,11.303 S3.2@27.303,11.303
  Bottom Layer w0.4: R3.1@23.009,40.588 23.009,30.841 25.75,28.1 25.75,12.942 S3.2@27.309,11.383
NetR4_1: R4.1 S4.2 | length 31.5
  Top Layer w0.4: S4.2@23.503,27.391 23.594,27.3 v1(27.15,27.3)
  Bottom Layer w0.4: R4.1@26.317,40.588 26.317,37.917 24.35,35.95 24.35,30.95 27.15,28.15 v1(27.15,27.3)
  Bottom Layer w1: S4.2@23.503,27.391 23.503,14.971 S4.2@23.583,14.891
NetR5_1: R5.1 S5.2 | length 49.1
  Top Layer w0.4: S5.2@11.103,27.391 11.859,27.391 14.9,24.35 29.35,24.35 v1(29.7,24)
  Bottom Layer w0.4: R5.1@29.5,40.55 29.5,24.2 v1(29.7,24)
  Bottom Layer w1: S5.2@11.1,27.35 11.183,27.267 S5.2@11.183,14.891
NetR33_1: R33.1 U3.39 | length 13.8
  Top Layer w0.25: U3.39@91.877,113.826 92.75,114.7 104.181,114.7 R33.1@104.988,113.893
NetR37_1: R37.1 R306.2 U3.26 | length 58.7
  Top Layer w0.25: U3.26@89.048,107.568 93.15,103.467 v1(93.15,100.35)
  Top Layer w0.4: R306.2@71.488,102.293 72.407,102.293 72.45,102.25 v1(72.45,102.3) ; v1(72.5,92.5) 93.05,92.5 v1@93.15,92.4 ; v1@93.136,92.414 102.109,92.414 R37.1@102.988,93.293
  Bottom Layer w0.4: v1(72.45,102.3) 72.45,92.55 v1(72.5,92.5) ; v1@93.15,92.4 v1(93.15,100.35) v1@93.2,100.4
  other v1: 93.25,92.5
NetR38_1: R38.1 R305.2 U3.28 | length 61.3
  Top Layer w0.25: U3.28@89.755,108.275 94.85,103.181 v1(94.85,100.3)
  Top Layer w0.4: R305.2@71.488,105.193 73.243,105.193 v1(73.25,105.2) ; v1(73.55,93.85) 74.1,93.3 92.3,93.3 92.55,93.55 95.35,93.55 95.85,93.05 100.05,93.05 R38.1@103,96
  Bottom Layer w0.4: v1(73.25,105.2) 73.55,104.9 v1(73.55,93.85) ; v1(94.8,93.55) 94.8,100.25 v1(94.85,100.3)
NetR39_1: R39.1 U3.27 | length 25.9
  Top Layer w0.25: U3.27@89.402,107.922 94,103.324 94,99.9 94.6,99.3 95.25,99.3 v1(96.2,100.25)
  Top Layer w0.4: v1(96.2,106.55) 102.931,106.55 R39.1@102.988,106.493
  Bottom Layer w0.4: v1(96.2,100.25) v1(96.2,106.55)
NetR40_2: R40.2 U7.7 | length 3.2
  Top Layer w0.5: U7.7@123.339,69.932 125.182,69.932 125.357,70.107 R40.2@126.462,70.107
NetR41_2: R41.2 U7.5 | length 3.2
  Top Layer w0.5: U7.5@123.339,67.392 125.108,67.392 125.293,67.207 R41.2@126.462,67.207
NetR42_1: R42.1 U3.21 | length 11.4
  Top Layer w0.25: R42.1@78.112,100.607 78.807,100.607 79.9,101.7 79.9,102.557 81.293,103.95 81.666,103.95 82.7,104.984 82.7,105.357 U3.21@85.619,108.275
NetR43_2: R43.2 U15.2 | length 20.2
  Bottom Layer w0.4: R43.2@10.412,94.793 9.65,94.031 9.65,83.55 11.3,81.9 14.8,81.9 15.332,81.368 U15.2@17.389,81.368
NetR44_1: R44.1 U3.20 | length 9.7
  Top Layer w0.25: R44.1@78.112,103.107 79.743,103.107 80.553,103.917 80.986,104.35 81.5,104.35 82.3,105.15 82.3,105.664 U3.20@85.265,108.629
NetR45_1: R45.1 U3.7 | length 7.5
  Top Layer w0.25: R45.1@78.512,115.007 79.557,115.007 81.25,116.7 82.745,116.7 U3.7@84.558,114.887
NetR47_2: R47.2 U14.10 U15.8 | length 15.8
  Top Layer w0.4: v1(25.6,81.7) 25.15,81.7 24.65,82.2 24.65,85.1 25.428,85.878 v1(25.95,86.4)
  Bottom Layer w0.4: U15.8@22.589,80.098 25.002,80.098 R47.2@25.05,80.05 ; R47.2@25.2,80.05 R47.2@25.05,80.05 ; v1(25.6,81.7) 25.6,80.6 25.2,80.2 25.053,80.053 R47.2@25.05,80.05 ; v1(25.95,86.4) 25.95,85.7 27.817,83.833 U14.10@29.889,83.833
NetR48_1: R48.1 U16.3 | length 11.8
  Top Layer w0.4: v1(24.612,86.762) 24.612,92.812 v1(25.3,93.5)
  Bottom Layer w0.4: U16.3@22.611,86.762 v1(24.612,86.762) ; v1(25.3,93.5) 25.488,93.688 R48.1@27.993,93.688
NetR49_2: R49.2 U3.24 | length 33.1
  Top Layer w0.25: v1(80.75,101.1) 81.15,101.1 82.55,102.5 82.55,103.085 85.225,105.761 U3.24@86.68,107.215 ; R49.2@81.893,124.412 81.893,123.207 v1@81.9,123.2
  Bottom Layer w0.4: v1(80.75,101.1) 80.2,101.65 80.2,119.3 81.1,120.2 81.1,122.35 81.9,123.15 v1@81.9,123.2
  other v1: 81.85,122.85
NetR52_1: R52.1 U16.1 | length 12.4
  Top Layer w0.4: v1(20.55,97.8) 21,97.35 v1@21,89.25
  Bottom Layer w0.4: v1(20.55,97.8) 22.006,97.8 R52.1@22.393,98.188 ; v1@21,89.25 21.052,89.302 U16.1@22.611,89.302
  other v1: 20.7,89.25
NetR53_1: R53.1 U8.1 | length 21.3
  Bottom Layer w0.4: U8.1@22.6,94.65 24.8,94.65 25.2,95.05 35.9,95.05 38.993,98.143 R53.1@38.993,101.588
NetR72_1: R72.1 U5.3 | length 9.7
  Top Layer w0.4: R72.1@94.309,18.714 94.35,18.756 v1@94.35,20.2 ; v1(94.35,26.9) 94.37,26.88 U5.3@95.796,26.88
  Bottom Layer w0.4: v1@94.35,20.2 v1(94.35,26.9)
  other v1: 94.35,20.6
NetR73_2: R73.2 U5.7 | length 10.1
  Top Layer w0.4: v1(86.6,21.35) 86.636,21.314 R73.2@88.509,21.314 ; v1(87.05,25.65) 87.09,25.61 U5.7@90.096,25.61
  Bottom Layer w0.4: v1(86.6,21.35) 87.8,22.55 87.8,24.85 87.05,25.6 v1(87.05,25.65)
NetR89_2: R89.2 R90.1 U2.4 | length 8.1
  Bottom Layer w0.4: U2.4@34.075,73.78 38.37,73.78 39.107,73.043 R90.1@39.107,70.312
NetR92_2: R92.2 R93.1 | length 2.4
  Top Layer w0.4: R93.1@216.109,96.214 R92.2@218.509,96.214
NetR94_2: R94.2 R95.1 | length 2.4
  Top Layer w0.4: R95.1@216.109,93.414 R94.2@218.509,93.414
NetR96_2: R96.2 R97.1 | length 2.5
  Top Layer w0.4: R97.1@216.05,90.7 216.064,90.714 R96.2@218.509,90.714
NetR98_2: R98.2 R99.1 | length 2.4
  Top Layer w0.4: R99.1@216.109,88.014 R98.2@218.509,88.014
NetR104_1: R104.1 U100.7 | length 4.3
  Top Layer w1: U100.7@164.904,121.063 167.241,123.4 R104.1@168.2,123.4
NetR105_2: R105.2 U100.2 | length 2.8
  Top Layer w0.4: R105.2@154.507,121.188 154.631,121.063 U100.2@157.284,121.063
NetR110_1: R110.1 U100.5 | length 3.9
  Top Layer w0.6: U100.5@164.904,115.983 166.1,114.788 R110.1@168.307,114.788
NetU2_17: U2.17
NetU13_3: 
NetU14_9: U14.9 U16.4 | length 8.7
  Bottom Layer w0.4: U16.4@22.611,85.492 24.958,85.492 25,85.45 ; 24.8,85.45 25.05,85.45 27.3,83.2 28,83.2 28.637,82.563 U14.9@29.889,82.563
NetU103_4: U103.4 U103.5 | length 5.2
  Top Layer w0.5: U103.4@121.9,78.595 U103.5@127.1,78.595
OFF1: JP1.25 R54.2 | length 16.3
  Top Layer w0.4: R54.2@218.288,70.793 220.294,72.8 226.15,72.8 226.45,72.5 JP1.25@233.589,72.5
OFF2: JP1.26 R55.2 | length 9.4
  Top Layer w0.4: R55.2@224.888,70.793 226.243,70.793 v1(226.5,71.05)
  Bottom Layer w0.4: v1(226.5,71.05) 227.95,72.5 JP1.26@233.589,72.5
P0_0: U1.46
P0_1: U1.47
P0_2: JP4.20 U1.98 | length 43.2
  Top Layer w0.25: JP4.20@60,90.76 64.44,90.76 65,90.2 93.066,90.2 94.5,88.766 94.5,87.171 U1.98@90.045,82.716
P0_3: JP4.19 U1.99 | length 42.6
  Top Layer w0.25: JP4.19@60,88.22 61.58,89.8 92.9,89.8 94.1,88.6 94.1,87.478 U1.99@89.691,83.069
P0_5: U1.80
P0_6: U1.79
P0_7: U1.78
P0_8: U1.77
P0_9: U1.76
P0_15: U1.62 U5.6 | length 60.1
  Top Layer w0.25: U1.62@93.226,67.866 103.843,57.25 v1(104.8,57.25)
  Top Layer w0.5: U5.6@90.096,26.88 91.43,26.88 94.1,29.55 101.9,29.55 103.65,31.3 v1(106,31.3)
  Bottom Layer w0.4: v1(104.8,57.25) 105.75,56.3 105.9,56.15 v1@105.9,31.35
P0_17: U1.61 U5.2 | length 53.7
  Top Layer w0.25: U1.61@92.873,67.513 102.85,57.536 v1(102.85,56.4)
  Top Layer w0.4: U5.2@95.796,25.61 101.96,25.61 v1(103.15,26.8)
  Bottom Layer w0.4: v1(102.85,56.4) 102.3,55.85 102.3,50.05 103.7,48.65 103.7,31 103.15,30.45 v1(103.15,26.8)
P0_18: U1.60 U5.5 | length 52.5
  Top Layer w0.25: U1.60@92.519,67.159 101.5,58.179 v1(101.5,57.25)
  Top Layer w0.4: U5.5@90.096,28.15 91.05,28.15 93.6,30.7 v1(101.25,30.7)
  Bottom Layer w0.4: v1(101.25,30.7) 101.25,57 v1(101.5,57.25)
P0_19: Q2.1 R121.1 R122.1 U1.59 | length 96
  Top Layer w0.25: U1.59@92.166,66.806 97.1,61.872 97.1,57.5 98.55,56.05 v1(98.55,55.45)
  Top Layer w0.4: v1(98.75,18.7) 110.85,18.7 112.15,17.4 133.7,17.4 134.6,18.3 139.85,18.3 141,18.3 141.888,19.188 Q2.1@142.671,19.188
  Bottom Layer w0.4: v1(98.55,55.45) 98.75,55.25 v1(98.75,18.7)
P0_20: Q3.1 R123.1 R126.1 U1.58 | length 105
  Top Layer w0.25: U1.58@91.812,66.452 96.55,61.714 96.55,56.7 97.6,55.65 v1(97.6,54.2)
  Top Layer w0.4: v1(97.3,19) 98.05,19.75 99.4,19.75 99.7,19.45 111.35,19.45 112.45,18.35 132.25,18.35 v1@132.45,18.55 ; v1(132.4,26.5) 132.5,26.4 140.4,26.4 141.188,27.188 Q3.1@142.671,27.188
  Bottom Layer w0.4: v1(97.3,19) 97.9,19.6 97.9,36 97.6,36.3 v1(97.6,54.2) ; v1(132.4,18.5) v1(132.4,26.5)
P0_21: Q4.1 R124.1 R127.1 U1.57 | length 79.9
  Top Layer w0.25: U1.57@91.459,66.099 96,61.557 96,55.75 v1(96.35,55.4)
  Top Layer w0.4: v1(96.8,35) 97.1,34.7 121.1,34.7 121.4,35 123.2,35 123.75,34.45 141.85,34.45 Q4.1@142.6,35.2
  Bottom Layer w0.4: v1(96.35,55.4) 96.5,55.25 96.5,35.3 v1(96.8,35)
P0_22: Q7.1 R125.1 R128.1 U1.56 | length 151
  Top Layer w0.25: U1.56@91.105,65.745 95.45,61.4 v1(95.45,54.2)
  Top Layer w0.4: v1(95.4,47.15) 95.7,46.85 104.75,46.85 108.35,50.45 120.35,50.45 121.8,51.9 124.55,51.9 125.5,50.95 149.85,50.95 156.55,57.65 160.05,57.65 161.55,56.15 176.7,56.15 177.4,56.85 182,56.85 v1(182.5,56.35) ; v1(182,30.3) 183.85,30.3 186.912,27.238 Q7.1@186.912,26.071 186.912,24.065 R128.1@187.891,23.086
  Bottom Layer w0.4: v1(95.4,47.15) 95.45,47.2 v1(95.45,54.2) ; v1(182,30.3) 182.5,30.8 v1(182.5,56.35)
P0_23: U1.9 U4.3 | length 213.8
  Top Layer w0.25: v1(67.5,87.2) 67.85,86.85 70.1,86.85 70.45,87.2 77.428,87.2 U1.9@84.034,80.594
  Top Layer w0.4: v1(67.2,36.9) 68.15,36.9 68.45,37.2 70.9,37.2 71.2,36.9 81.45,36.9 82.95,38.4 87,38.4 88.5,36.9 181.75,36.9 182.4,37.55 198.55,37.55 v1(198.85,37.25) ; U4.3@197.07,28.712 198.788,28.712 v1(198.8,28.7)
  Bottom Layer w0.4: v1(67.2,36.9) 67.2,86.9 v1(67.5,87.2) ; v1(198.8,28.7) 198.8,37.2 v1(198.85,37.25)
P0_24: U1.8 U10.3 | length 191
  Top Layer w0.25: v1(66.05,87.1) 67.1,88.15 68,88.15 68.75,87.4 69.8,87.4 70.1,87.7 ; 70.066,87.7 77.636,87.7 U1.8@84.388,80.948
  Top Layer w0.4: v1(65.95,38.2) 68.05,38.2 68.3,37.95 81.722,37.95 82.722,38.95 87.228,38.95 88.228,37.95 v1(173.75,37.95) ; U10.3@172.075,28.705 173.795,28.705 v1(173.8,28.7)
  Bottom Layer w0.4: v1(65.95,38.2) 66.35,38.6 66.35,86.8 v1(66.05,87.1) ; v1(173.75,37.95) 173.75,28.75 v1(173.8,28.7)
P0_25: U1.7 U11.3 | length 134.4
  Top Layer w0.25: v1(65.05,88.15) 65.6,88.7 68.2,88.7 68.95,87.95 69.75,87.95 70.05,88.25 77.793,88.25 U1.7@84.741,81.301
  Top Layer w0.4: v1(64.8,39.35) 68.35,39.35 68.7,39 81.994,39 82.494,39.5 87.456,39.5 87.956,39 v1(114.25,39) ; U11.3@112.775,28.705 114.295,28.705 v1(114.3,28.7)
  Bottom Layer w0.4: v1(64.8,39.35) 65.6,40.15 65.6,85.7 65.05,86.25 v1(65.05,88.15) ; v1(114.25,39) 114.3,38.95 v1(114.3,28.7)
P0_26: C42.1 D7.2 R71.1 U1.6 | length 129.2
  Top Layer w0.25: v1(69.3,88.85) 77.9,88.85 U1.6@85.095,81.655
  Top Layer w0.4: v1(68.2,45.3) v1(87.4,45.3) ; v1@84.95,7.7 84.95,6.269 C42.1@84.893,6.212 84.901,6.22 87.807,6.22 R71.1@87.807,8.988
  Bottom Layer w0.4: v1(68.2,45.3) 67.95,45.55 67.95,86 69.3,87.35 v1(69.3,88.85) ; v1@84.95,7.7 84.95,12.75 88.55,16.35 88.5,16.4 88.5,41.75 88.75,42 88.75,43 87.4,44.35 v1(87.4,45.3)
  other v1: 84.95,8.05
P0_27: R35.1 U1.25 | length 56.9
  Top Layer w0.25: v1(58.15,71.75) 58.2,71.7 63.45,71.7 65.4,69.75 73.19,69.75 U1.25@78.377,74.937
  Top Layer w0.4: R35.1@57.788,38.193 57.788,39.538 v1@57.85,39.6
  Bottom Layer w0.4: v1@57.85,39.6 58.15,39.9 v1(58.15,71.75)
  other v1: 58,40
P0_29: JP4.12 U1.29 | length 23.5
  Top Layer w0.25: JP4.12@60,70.44 61.95,68.49 61.95,67.35 62.5,66.8 74.836,66.8 U1.29@79.438,71.402
P0_30: JP4.11 U1.30 | length 22.6
  Top Layer w0.25: JP4.11@60,67.9 61.8,66.1 74.843,66.1 U1.30@79.791,71.048
P1_0: U1.95 U3.3 | length 73.7
  Top Layer w0.25: v1(76.7,94.45) 77.25,93.9 91.95,93.9 92.15,94.1 93.7,94.1 94.1,94.5 95.45,94.5 ; v1(77.75,121.9) 80.35,121.9 U3.3@86,116.25 ; U1.95@91.105,81.655 96,86.55 v1(96,89.2) ; 95.45,94.45 95.7,94.2 v1(96.5,94.2)
  Bottom Layer w0.4: v1(76.7,94.45) 76.7,103.5 77.8,104.6 77.8,105.95 77.75,106 v1(77.75,121.9) ; v1(96,89.2) 96,93.7 v1(96.5,94.2)